# Altium PCB new.PcbDoc (part 1 of 2)
Units mil, origin at the board's own origin, x right, y up, seen from the top; angles counter-clockwise.
Board outline 4410 x 3685.04 mil, 2 copper layers (Top Layer, Bottom Layer), stack 21 mil thick; 81 components, 203 nets, 659 pads, 105 vias.
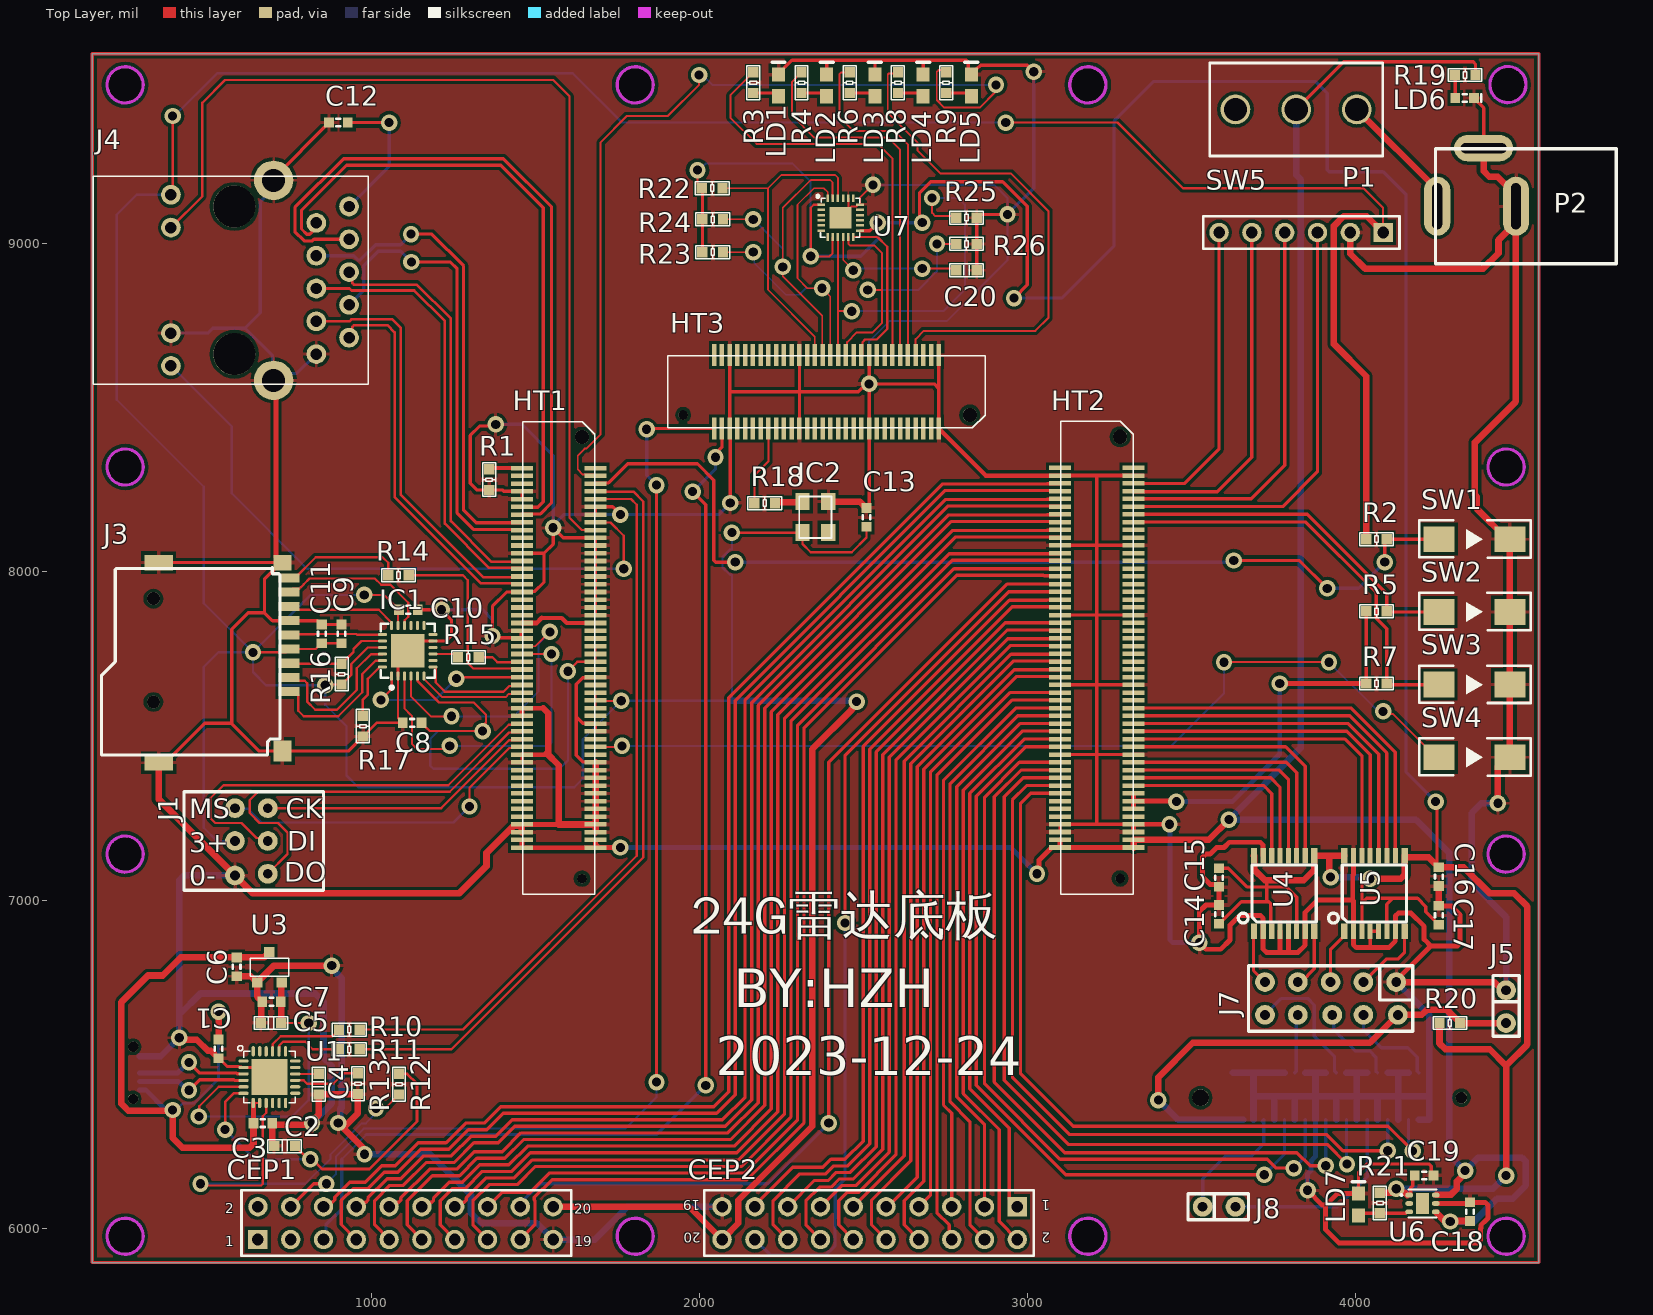
[diagram p0: Top Layer view]
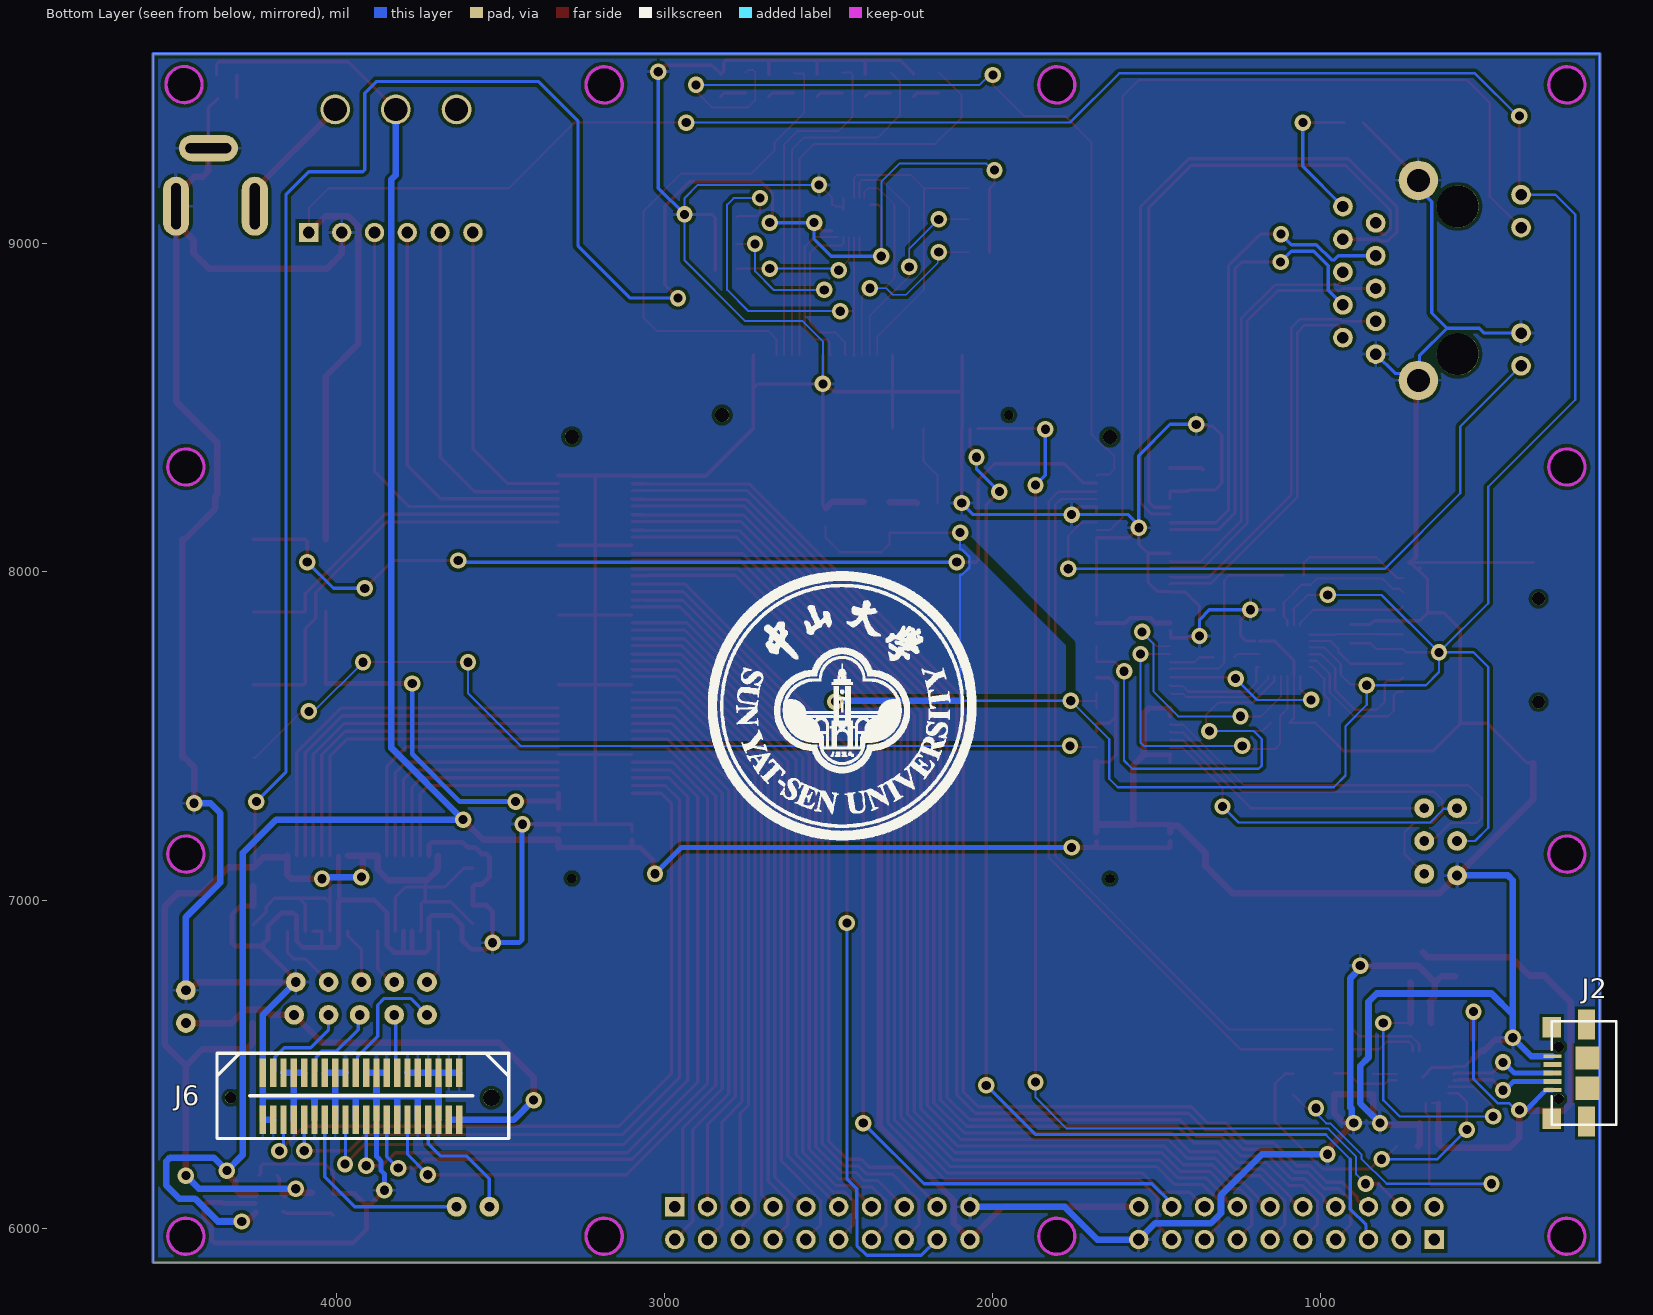
[diagram p1: Bottom Layer view, seen from below]

## Layer stack, top to bottom
Top Solder: solder mask 0.4, Solder Resist, Dk 3.5
Top Layer: signal copper 1.4
Dielectric 2: prepreg 2.8, PP-006, Dk 4.1
Dielectric 1: dielectric 12.6, FR-4, Dk 4.8
Dielectric 3: prepreg 2.8, PP-006, Dk 4.1
Bottom Layer: signal copper 1.4
Bottom Solder: solder mask 0.4, Solder Resist, Dk 3.5

## Board outline
150,5895 4560,5895 4560,9580.04 4559.45,9580 150,9580
cut-out: 305.12,9485 cw(c250,9485) 250,9429.88 cw(c250,9485) 194.88,9485 cw(c250,9485) 250,9540.12 cw(c250,9485)
cut-out: 305.12,5975 cw(c250,5975) 250,5919.88 cw(c250,5975) 194.88,5975 cw(c250,5975) 250,6030.12 cw(c250,5975)
cut-out: 305.12,7140 cw(c250,7140) 250,7084.88 cw(c250,7140) 194.88,7140 cw(c250,7140) 250,7195.12 cw(c250,7140)
cut-out: 305.12,8320 cw(c250,8320) 250,8264.88 cw(c250,8320) 194.88,8320 cw(c250,8320) 250,8375.12 cw(c250,8320)
cut-out: 1860.12,5975 cw(c1805,5975) 1805,5919.88 cw(c1805,5975) 1749.88,5975 cw(c1805,5975) 1805,6030.12 cw(c1805,5975)
cut-out: 1860.12,9485 cw(c1805,9485) 1805,9429.88 cw(c1805,9485) 1749.88,9485 cw(c1805,9485) 1805,9540.12 cw(c1805,9485)
cut-out: 3240.12,5975 cw(c3185,5975) 3185,5919.88 cw(c3185,5975) 3129.88,5975 cw(c3185,5975) 3185,6030.12 cw(c3185,5975)
cut-out: 3240.12,9485 cw(c3185,9485) 3185,9429.88 cw(c3185,9485) 3129.88,9485 cw(c3185,9485) 3185,9540.12 cw(c3185,9485)
cut-out: 4515.12,5975 cw(c4460,5975) 4460,5919.88 cw(c4460,5975) 4404.88,5975 cw(c4460,5975) 4460,6030.12 cw(c4460,5975)
cut-out: 4515.12,7140 cw(c4460,7140) 4460,7084.88 cw(c4460,7140) 4404.88,7140 cw(c4460,7140) 4460,7195.12 cw(c4460,7140)
cut-out: 4515.12,8320 cw(c4460,8320) 4460,8264.88 cw(c4460,8320) 4404.88,8320 cw(c4460,8320) 4460,8375.12 cw(c4460,8320)
cut-out: 4520.74,9485.83 cw(c4465.62,9485.83) 4465.62,9430.71 cw(c4465.62,9485.83) 4410.5,9485.83 cw(c4465.62,9485.83) 4465.62,9540.95 cw(c4465.62,9485.83)

## Design rules (kind name [scope] priority, off if disabled: settings)
Clearance Clearance_1 [All] p1: gap=10 ignorepadtopadclearanceinfootprint=FALSE except(0: Arc-Hole Track-Hole SMDPad-Hole THPad-Hole Via-Hole Fill-Hole Poly-Hole Region-Hole Text-Hole)
Clearance [All] p2: gap=5 ignorepadtopadclearanceinfootprint=FALSE except(0: Arc-Hole Track-Hole SMDPad-Hole THPad-Hole Via-Hole Fill-Hole Poly-Hole Region-Hole Text-Hole)
DiffPairsRouting [All] p1: maxlimit=10 minlimit=10 mostfreqgap=10 toplayer_minwidth=5 toplayer_maxwidth=15 toplayer_prefwidth=15 bottomlayer_minwidth=5 bottomlayer_maxwidth=15 bottomlayer_prefwidth=15 maxuncoupledlength=500
HoleToHoleClearance [All] p1: gap=5 allowstackedmicrovias=TRUE
PolygonConnect [All] p1: connectstyle=Relief reliefconductorwidth=10 reliefentries=4 polygonreliefangle="90 Angle" airgapwidth=10
RoutingVias [All] p1: holewidth=28 width=50 viastyle="Through Hole" minholewidth=28 minwidth=50 maxholewidth=28 maxwidth=50
SolderMaskExpansion [All] p1: expansion=4
Width [All] p1: maxlimit=20 minlimit=5 preferedwidth=10 minimp=50.000000 maximp=50.000000 favimp=50.000000
28 further rules are at their usual default settings.

## Classes and differential pairs
component class MPU9250: C20 R22 R23 R24 R25 R26 U7
component class Sheet2: C18 C19 J5 J6 J7 J8 LD7 R20 R21 U6
component class Sheet1: C14 C15 C16 C17 U4 U5
component class 15_PMU: LD6 P2 R19 SW5
component class 13_CEP: CEP1 CEP2
component class 12_PLCLK_100M: C13 IC2 R18
component class 11_BTN_LED_GPIO: LD1 LD2 LD3 LD4 LD5 P1 R2 R3 R4 R5 R6 R7 R8 R9 SW1 SW2 SW3 SW4
component class 07_PS_ETH_RJ45: C12 J4
component class 06_TF_CARD: C8 C9 C10 C11 IC1 J3 R14 R15 R16 R17
component class 05_USB_JTAG: J1
component class 03_UART_232: C1 C2 C3 C4 C5 C6 C7 J2 R10 R11 R12 R13 U1 U3
component class 02_connector: HT1 HT2 HT3 R1
differential pair B35_L22: +B35_L22_P -B35_L22_N
differential pair B35_L20: +B35_L20_P -B35_L20_N
differential pair B35_L18: +B35_L18_P -B35_L18_N
differential pair B35_L17: +B35_L17_P -B35_L17_N
differential pair B35_L16: +B35_L16_P -B35_L16_N
differential pair B35_L15: +B35_L15_P -B35_L15_N
differential pair B35_L14: +B35_L14_P -B35_L14_N
differential pair B35_L11: +B35_L11_P -B35_L11_N
differential pair B35_L5: +B35_L5_P -B35_L5_N
differential pair B35_L4: +B35_L4_P -B35_L4_N
differential pair B35_L3: +B35_L3_P -B35_L3_N
differential pair B35_L2: +B35_L2_P -B35_L2_N
differential pair B34_L22: +B34_L22_P -B34_L22_N
differential pair B34_L21: +B34_L21_P -B34_L21_N
differential pair B34_L19: +B34_L19_P -B34_L19_N
differential pair B34_L18: +B34_L18_P -B34_L18_N
differential pair B34_L17: +B34_L17_P -B34_L17_N
differential pair B34_L11: +B34_L11_P -B34_L11_N
differential pair B34_L10: +B34_L10_P -B34_L10_N
differential pair B34_L9: +B34_L9_P -B34_L9_N
differential pair B34_L8: +B34_L8_P -B34_L8_N
differential pair B34_L7: +B34_L7_P -B34_L7_N
differential pair B34_L4: +B34_L4_P -B34_L4_N
differential pair B34_L2: +B34_L2_P -B34_L2_N
differential pair NewDifferentialPair16: +B35_L6_P -B35_L6_N
differential pair NewDifferentialPair15: +B34_L16_P -B34_L16_N
differential pair NewDifferentialPair14: +B34_L15_P -B34_L15_N
differential pair NewDifferentialPair13: +B34_L14_P -B34_L14_N
differential pair NewDifferentialPair12: +B34_L23_P -B34_L23_N
differential pair NewDifferentialPair11: +B34_L12_P -B34_L12_N
differential pair NewDifferentialPair10: +B34_L20_P -B34_L20_N
differential pair NewDifferentialPair9: +B34_L13_P -B34_L13_N
differential pair NewDifferentialPair8: +B34_L24_P -B34_L24_N
differential pair NewDifferentialPair7: +B34_L5_P -B34_L5_N
differential pair NewDifferentialPair6: +B34_L3_P -B34_L3_N
differential pair NewDifferentialPair5: +B34_L6_P -B34_L6_N
differential pair NewDifferentialPair4: +B34_L1_P -B34_L1_N
differential pair NewDifferentialPair3: +ETH-TD3_P -ETH-TD3_N
differential pair NewDifferentialPair2: +ETH-TD2_P -ETH-TD2_N
differential pair NewDifferentialPair1: +ETH-TD1_P -ETH-TD1_N
differential pair ETH-TD0: +ETH-TD0_P -ETH-TD0_N

## Components (designator, comment, footprint, x,y, rotation, side; value= is the part's Value field where it differs from the comment)
C1 "10uf" CAP0603 535,6546.46 r90 top
C2 "10uf" CAP0603 670,6320 r0 top
C3 "100nF" C0603 736.5,6250 r0 top
C4 "4.7uF" C0603 840,6438.5 r90 top
C5 "100nF" C0603 695,6625 r0 top
C6 "2.2uf" CAP0603 590,6796.46 r90 top
C7 "10uf" CAP0603 696.46,6690 r0 top
C8 "0.1uf" CAP0603 1125,7540 r180 top value=0.1uF
C9 "0.1uf" CAP0603 910,7811.46 r90 top value=0.1uF
C10 "0.1uf" CAP0603 1113.54,7885 r0 top value=0.1uF
C11 "10uf/6V3" CAP0603 850,7811.46 r90 top value=4.7uF
C12 "0.1uf" CAP0603 900,9370 r0 top
C13 "0.1uf" CAP0603 2510,8166.46 r90 top value=10nF
C14 "1uf/6V3" CAP0603 3585,6956.46 r90 top value=4.7uF
C15 "1uf/6V3" CAP0603 3585,7068.54 r270 top value=4.7uF
C16 "1uf/6V3" CAP0603 4255,7071.46 r270 top value=4.7uF
C17 "1uf/6V3" CAP0603 4255,6953.54 r90 top value=4.7uF
C18 "1uf/6V3" CAP0603 4350,6050 r270 top value=4.7uF
C19 "1uf/6V3" CAP0603 4210,6160 r0 top value=4.7uF
C20 "100nF" C0603 2815,8920 r180 top
CEP1 "HEADER20" HEADER10X2X2.5 655,5965 r0 top
CEP2 "HEADER20" HEADER10X2X2.5 2970,6065 r180 top
HT1 "FX8-100S-SV" FX8-100S-SV92 1626.09,8286.14 r0 top
HT2 "FX8-100S-SV" FX8-100S-SV92 3266.49,8286.79 r0 top
HT3 "FX8-60S-SV" FX8-60S-SV92 2730.87,8661.58 r180 top
IC1 "TXS02612RTWR" QFN24 1111.77,7759.84 r90 top
IC2 "100MHZ" 3225 2354.37,8167.24 r90 top value=26MHz
J1 "JTAG" 2*3P 735,7330 r270 top
J2 "Micro_USB2.0_DIP1" MicroUsb 190.13,6472.37 r0 bottom
J3 "SDK" TF_K 750,7635.16 r180 top
J4 "HY911130A" HY911130A 582.91,8889.17 r270 top
J5 "2P" 2P 4460,6725 r270 top
J6 "radar" BTB_40P_0.8_G 3970.43,6503.31 r180 bottom
J7 "ZERO_O" 2*5P 3725,6750 r0 top
J8 "2P" 2P 3535,6065 r0 top
LD1 "LED" 0603D 2241.86,9450 r90 top
LD2 "LED" 0603D 2388.9,9450 r90 top
LD3 "LED" 0603D 2535.93,9450 r90 top
LD4 "LED" 0603D 2682.97,9450 r90 top
LD5 "LED" 0603D 2830,9450 r90 top
LD6 "LED" D0603 4333.54,9445 r180 top value=RED
LD7 "LED" 0603D 4010,6038.07 r90 top
P1 "HEADER6" HEADER1X6 4085,9035 r180 top
P2 "DC" DC5.0 4415,9198 r0 top
R1 "0R" R0603 1360,8281.5 r90 top value=390
R2 "20k" R0603 4065,8100 r180 top
R3 "2.2k" R0603 2165,9491.41 r90 top
R4 "2.2k" R0603 2312.03,9491.41 r90 top
R5 "20k" R0603 4065,7880 r180 top
R6 "2.2k" R0603 2459.07,9491.41 r90 top
R7 "20k" R0603 4065,7660 r180 top
R8 "2.2k" R0603 2606.1,9491.41 r90 top
R9 "2.2k" R0603 2753.14,9491.41 r90 top
R10 "100R" R0603 933.5,6605 r0 top
R11 "100R" R0603 933.5,6545 r0 top
R12 "10K" R0603 1085,6438.5 r90 top
R13 "10K" R0603 960,6440 r270 top
R14 "150R" R0603 1083.5,7990 r180 top value=150
R15 "49.9" R0603 1296.5,7740 r0 top
R16 "4.7K" R0603 910,7688.5 r270 top
R17 "4.7K" R0603 975,7530 r90 top
R18 "20R" R0603 2200,8210 r0 top
R19 "2K2" R0603 4335,9515 r180 top value=390
R20 "0R" R0603 4288.5,6625 r0 top value=390
R21 "4.7K" R0603 4075,6076.5 r90 top
R22 "10K" R0603 2040,9170 r180 top
R23 "10K" R0603 2041.5,8975 r180 top
R24 "10K" R0603 2041.5,9075 r180 top
R25 "10K" R0603 2815,9080 r0 top
R26 "10K" R0603 2815,9000 r0 top
SW1 "SW-1" SW-3X9 4255,8100 r0 top
SW2 "SW-1" SW-3X9 4255,7878.33 r0 top
SW3 "SW-1" SW-3X9 4255,7656.67 r0 top
SW4 "SW-1" SW-3X9 4255,7435 r0 top
SW5 "SW123" "SW1-2-3 -B" 3634.92,9410 r0 top
U1 "CP2104" QFN24_50P4X4X1 690,6460 r0 top
U3 "XC6206P182MR" SOT23 690,6795 r180 top
U4 "ADS7853IPWR" TSSOP16-0.65-5X4.4MM 3765,7020 r0 top
U5 "ADS7853IPWR" TSSOP16-0.65-5X4.4MM 4040,7020 r0 top
U6 "LP5912-3.3" WSON-6_L2.0-W2.0-P0.65-TL-EP -13787.64,19569.9 r0 top
U7 "MPU9250" MPU9250 2430,9080 r0 top

## Footprints (in the part's own frame and the unit in brackets; to place one, negate y for a bottom-side part, rotate by r counter-clockwise, add the part's x,y. Pads: shape width x height; smd on the part's side, far side on the other; paste and mask are expansions set on the pad)
2*3P [mil]
  round 60 hole 30: 1(50,-50) 2(50,-150) 3(150,-50) 4(150,-150) 5(250,-50) 6(255,-150)
  silkscreen extent 0,-305 300,120
2*5P [mil]
  round 60 hole 30: 1(0,0) 2(0,-100) 3(100,0) 4(100,-100) 5(200,0) 6(205,-100) 7(300,0) 8(300,-100) 9(400,0) 10(405,-100)
  silkscreen extent -50,-150 450,50
2P [mil]
  round 60 hole 30: 1(0,0) 2(100,0)
  silkscreen extent -45,-40 140,40
0603D [mm]
  rect 1.1x1 smd: 1(0,0) 2(1.7,0)
  silkscreen extent 2.63,-0.51 2.63,0.51, body extent -0.64,-0.58 2.34,0.58, height 0.76
3225 [mm]
  rect 1.3x1.1 smd: 1(-1.2,-1) 2(1.2,-1) 3(1.2,1) 4(-1.2,1)
  silkscreen extent -1.6,-1.25 1.6,1.25
BTB_40P_0.8_G [mm]
  rect 0.5x2.22 smd: 1(-6.477,-0.762) 2(-5.677,-0.762) 3(-4.877,-0.762) 4(-4.077,-0.762) 5(-3.277,-0.762) 6(-2.477,-0.762) 7(-1.677,-0.762) 8(-0.877,-0.762) 9(-0.077,-0.762) 10(0.723,-0.762) 11(1.523,-0.762) 12(2.323,-0.762) 13(3.123,-0.762) 14(3.923,-0.762) 15(4.723,-0.762) 16(5.523,-0.762) 17(6.323,-0.762) 18(7.123,-0.762) 19(7.923,-0.762) 20(8.723,-0.762) 21(8.723,-4.402) 22(7.923,-4.402) 23(7.123,-4.402) 24(6.323,-4.402) 25(5.523,-4.402) 26(4.723,-4.402) 27(3.923,-4.402) 28(3.123,-4.402) 29(2.323,-4.402) 30(1.523,-4.402) 31(0.723,-4.402) 32(-0.077,-4.402) 33(-0.877,-4.402) 34(-1.677,-4.402) 35(-2.477,-4.402) 36(-3.277,-4.402) 37(-4.077,-4.402) 38(-4.877,-4.402) 39(-5.677,-4.402) 40(-6.477,-4.402)
  round 0.9 hole 0.9 unplated: ""(-8.976,-2.692)
  round 1.3 hole 1.3 unplated: ""(11.222,-2.692)
  silkscreen extent -10.03,-5.84 12.57,0.76
C0603 [mm]
  rect 0.8x0.8 smd: 1(-0.8,0) 2(0.8,0)
  silkscreen extent -1.3,-0.5 1.3,0.5, body extent -1.3,-0.5 1.3,0.5, height 3.81
CAP0603 [mm]
  rect 0.75x0.8 smd: 1(-0.725,0) 2(0.725,0)
  silkscreen extent -0.15,-0.3 0.15,0.3, body extent -0.86,-0.46 0.86,0.46, height 0.92
D0603 [mm]
  rect 0.75x0.8 smd: A(0.725,0) K(-0.725,0)
  silkscreen extent -1.3,-0.3 0.15,0.3, body extent -0.86,-0.46 0.86,0.46, height 0.92
DC5.0 [mil]
  oval 80x180 hole 30 slot 140 at 90 deg: 1(-165.16,-83) 2(75,-83)
  oval 180x80 hole 30 slot 140 at 0 deg: 2(-23.43,94)
  silkscreen extent -170,-258 381,92
FX8-60S-SV92 [mm]
  rect 0.35x1.7 smd: A1(0,0) A2(0.6,0) A3(1.2,0) A4(1.8,0) A5(2.4,0) A6(3,0) A7(3.6,0) A8(4.2,0) A9(4.8,0) A10(5.4,0) A11(6,0) A12(6.6,0) A13(7.2,0) A14(7.8,0) A15(8.4,0) A16(9,0) A17(9.6,0) A18(10.2,0) A19(10.8,0) A20(11.4,0) A21(12,0) A22(12.6,0) A23(13.2,0) A24(13.8,0) A25(14.4,0) A26(15,0) A27(15.6,0) A28(16.2,0) A29(16.8,0) A30(17.4,0) B1(0,5.7) B2(0.6,5.7) B3(1.2,5.7) B4(1.8,5.7) B5(2.4,5.7) B6(3,5.7) B7(3.6,5.7) B8(4.2,5.7) B9(4.8,5.7) B10(5.4,5.7) B11(6,5.7) B12(6.6,5.7) B13(7.2,5.7) B14(7.8,5.7) B15(8.4,5.7) B16(9,5.7) B17(9.6,5.7) B18(10.2,5.7) B19(10.8,5.7) B20(11.4,5.7) B21(12,5.7) B22(12.6,5.7) B23(13.2,5.7) B24(13.8,5.7) B25(14.4,5.7) B26(15,5.7) B27(15.6,5.7) B28(16.2,5.7) B29(16.8,5.7) B30(17.4,5.7)
  round 1.092 hole 1.1: C1(-2.4,4.65)
  round 0.711 hole 0.75: C2(19.8,4.65)
  silkscreen extent -3.6,0.05 21.01,5.65, body extent -3.66,-0.87 21,6.63, height 3.81
FX8-100S-SV92 [mm]
  rect 1.7x0.35 smd: A1(-4.221,0.782) A2(-4.221,0.182) A3(-4.221,-0.418) A4(-4.221,-1.018) A5(-4.221,-1.618) A6(-4.221,-2.218) A7(-4.221,-2.818) A8(-4.221,-3.418) A9(-4.221,-4.018) A10(-4.221,-4.618) A11(-4.221,-5.218) A12(-4.221,-5.818) A13(-4.221,-6.418) A14(-4.221,-7.018) A15(-4.221,-7.618) A16(-4.221,-8.218) A17(-4.221,-8.818) A18(-4.221,-9.418) A19(-4.221,-10.018) A20(-4.221,-10.618) A21(-4.221,-11.218) A22(-4.221,-11.818) A23(-4.221,-12.418) A24(-4.221,-13.018) A25(-4.221,-13.618) A26(-4.221,-14.218) A27(-4.221,-14.818) A28(-4.221,-15.418) A29(-4.221,-16.018) A30(-4.221,-16.618) A31(-4.221,-17.218) A32(-4.221,-17.818) A33(-4.221,-18.418) A34(-4.221,-19.018) A35(-4.221,-19.618) A36(-4.221,-20.218) A37(-4.221,-20.818) A38(-4.221,-21.418) A39(-4.221,-22.018) A40(-4.221,-22.618) A41(-4.221,-23.218) A42(-4.221,-23.818) A43(-4.221,-24.418) A44(-4.221,-25.018) A45(-4.221,-25.618) A46(-4.221,-26.218) A47(-4.221,-26.818) A48(-4.221,-27.418) A49(-4.221,-28.018) A50(-4.221,-28.618) B1(1.479,0.782) B2(1.479,0.182) B3(1.479,-0.418) B4(1.479,-1.018) B5(1.479,-1.618) B6(1.479,-2.218) B7(1.479,-2.818) B8(1.479,-3.418) B9(1.479,-4.018) B10(1.479,-4.618) B11(1.479,-5.218) B12(1.479,-5.818) B13(1.479,-6.418) B14(1.479,-7.018) B15(1.479,-7.618) B16(1.479,-8.218) B17(1.479,-8.818) B18(1.479,-9.418) B19(1.479,-10.018) B20(1.479,-10.618) B21(1.479,-11.218) B22(1.479,-11.818) B23(1.479,-12.418) B24(1.479,-13.018) B25(1.479,-13.618) B26(1.479,-14.218) B27(1.479,-14.818) B28(1.479,-15.418) B29(1.479,-16.018) B30(1.479,-16.618) B31(1.479,-17.218) B32(1.479,-17.818) B33(1.479,-18.418) B34(1.479,-19.018) B35(1.479,-19.618) B36(1.479,-20.218) B37(1.479,-20.818) B38(1.479,-21.418) B39(1.479,-22.018) B40(1.479,-22.618) B41(1.479,-23.218) B42(1.479,-23.818) B43(1.479,-24.418) B44(1.479,-25.018) B45(1.479,-25.618) B46(1.479,-26.218) B47(1.479,-26.818) B48(1.479,-27.418) B49(1.479,-28.018) B50(1.479,-28.618)
  round 1.092 hole 1.1: C1(0.429,3.182)
  round 0.711 hole 0.75: C2(0.429,-31.018)
  silkscreen extent -4.17,-32.22 1.43,4.38, body extent -5.12,-32.32 2.38,4.48, height 3.81
HEADER1X6 [mm]
  rect 1.5x1.5 hole 0.9: 1(0,0)
  round 1.5 hole 0.9: 2(2.54,0) 3(5.08,0) 4(7.62,0) 5(10.16,0) 6(12.7,0)
  silkscreen extent -1.27,-1.27 13.92,1.27
HEADER10X2X2.5 [mm]
  rect 1.5x1.5 hole 0.9: 1(0,0)
  round 1.5 hole 0.9: 2(0,2.54) 3(2.54,0) 4(2.54,2.54) 5(5.08,0) 6(5.08,2.54) 7(7.62,0) 8(7.62,2.54) 9(10.16,0) 10(10.16,2.54) 11(12.7,0) 12(12.7,2.54) 13(15.24,0) 14(15.24,2.54) 15(17.78,0) 16(17.78,2.54) 17(20.32,0) 18(20.32,2.54) 19(22.86,0) 20(22.86,2.54)
  silkscreen extent -1.27,-1.27 24.25,3.81
HY911130A [mil]
  round 60 hole 35: 1(-225,350) 2(-175,250) 3(-125,350) 4(-75,250) 5(-25,350) 6(25,250) 7(75,350) 8(125,250) 9(175,350) 10(225,250) 11(-260.83,-192.91) 12(-160.83,-192.91) 13(160.83,-192.91) 14(260.83,-192.91)
  round 120 hole 70: 15(-304.92,120.08) 16(304.92,120.08)
  round 128 hole 128: " "(-225,0) " "(225,0)
  silkscreen extent -317,-430 317,409, body extent -317,-430 317,409, height 150
MicroUsb [mm]
  round 0.8 hole 0.8: 0(2.144,-2.032) 0(2.15,2)
  rect 1.4x0.305 smd: 1(2.647,1.293) 5(2.647,-1.307)
  rect 1.4x0.4 smd: 2(2.647,0.643) 3(2.647,-0.007) 4(2.647,-0.657)
  rect 1.4x1.6 smd: M1(2.697,3.531) M2(2.697,-3.556)
  rect 1.3x2.3 smd: S1(-0.003,3.743) S4(-0.003,-3.757)
  rect 1.9x1.8 smd: S2(-0.092,1.168) S3(-0.092,-1.168)
  silkscreen extent -2.3,-4.01 2.7,3.99, body extent -2.37,-3.74 2.63,4.26, height 2
MPU9250 [mm]
  rect 0.6x0.2 smd: 1(-1.472,1) 2(-1.472,0.6) 3(-1.472,0.2) 4(-1.472,-0.2) 5(-1.472,-0.6) 6(-1.472,-1) 13(1.528,-1) 14(1.528,-0.6) 15(1.528,-0.2) 16(1.528,0.2) 17(1.528,0.6) 18(1.528,1)
  rect 0.2x0.6 smd: 7(-0.972,-1.5) 8(-0.572,-1.5) 9(-0.172,-1.5) 10(0.228,-1.5) 11(0.628,-1.5) 12(1.028,-1.5) 19(1.028,1.5) 20(0.628,1.5) 21(0.228,1.5) 22(-0.172,1.5) 23(-0.572,1.5) 24(-0.972,1.5)
  rect 1.7x1.7 smd: 25(0.026,-0.003)
  silkscreen extent -1.83,-1.5 1.53,1.76
QFN24 [mm]
  oval 0.7x0.25 smd: 1(-1.95,1.25) 2(-1.95,0.75) 3(-1.95,0.25) 4(-1.95,-0.25) 5(-1.95,-0.75) 6(-1.95,-1.25) 13(1.95,-1.25) 14(1.95,-0.75) 15(1.95,-0.25) 16(1.95,0.25) 17(1.95,0.75) 18(1.95,1.25)
  oval 0.25x0.7 smd: 7(-1.25,-1.95) 8(-0.75,-1.95) 9(-0.25,-1.95) 10(0.25,-1.95) 11(0.75,-1.95) 12(1.25,-1.95) 19(1.25,1.95) 20(0.75,1.95) 21(0.25,1.95) 22(-0.25,1.95) 23(-0.75,1.95) 24(-1.25,1.95)
  rect 2.6x2.6 smd: P(0,0)
  silkscreen extent -2.97,-2.1 2.1,2.1, body extent -2.08,-2.07 2.07,2.08, height 0.8
QFN24_50P4X4X1 [mm] "QFN24_50P4X4X1"
  oval 0.8x0.25 smd: 1(-2,1.25) 2(-2,0.75) 3(-2,0.25) 4(-2,-0.25) 5(-2,-0.75) 6(-2,-1.25) 13(2,-1.25) 14(2,-0.75) 15(2,-0.25) 16(2,0.25) 17(2,0.75) 18(2,1.25)
  oval 0.25x0.8 smd: 7(-1.25,-2) 8(-0.75,-2) 9(-0.25,-2) 10(0.25,-2) 11(0.75,-2) 12(1.25,-2) 19(1.25,2) 20(0.75,2) 21(0.25,2) 22(-0.25,2) 23(-0.75,2) 24(-1.25,2)
  rect 2.8x2.8 smd: 25(0,0)
  silkscreen extent -2.45,-2 2,2.45, body extent -2.5,-2.5 2.5,2.5, height 3.81
R0603 [mm] "R0603"
  rect 0.8x0.8 smd: 1(-0.8,0) 2(0.8,0)
  silkscreen extent -1.3,-0.5 1.3,0.5, body extent -1.3,-0.5 1.3,0.5, height 3.81
SOT23 [mm]
  rect 0.8x0.8 smd: 1(0.95,1.175) 2(-0.95,1.175) 3(0,-1.175)
  silkscreen extent -1.5,-0.7 1.5,0.7, body extent -1.7,-1.78 1.7,1.78, height 3.81
"SW1-2-3 -B" [mm]
  round 2.3 hole 1.8: 1(0,0) 2(4.7,0) 3(9.4,0)
  silkscreen extent -2,-3.6 11.4,3.6, body extent -1.7,-3.3 11.1,3.3, height 11
SW-3X9 [mm]
  rect 2.4x2 smd: 1(0,0) 2(5.5,0)
  silkscreen extent -1.52,-1.42 7.11,1.47, body extent -1.42,-1.3 6.93,1.35, height 1.78
TF_K [mm]
  rect 2.2x1.2 smd: 0(10.1,-10) 11(10.1,5.5)
  rect 1.6x0.7 smd: 1(0,0) 2(0,-1.1) 3(0,-2.2) 4(0,-3.3) 5(0,-4.4) 6(0,-5.5) 7(0,-6.6) 8(0,-7.7) 9(0,-8.8)
  rect 1.4x1.2 smd: 10(0.5,-10)
  rect 1.4x1.6 smd: 12(0.5,4.6)
  Top Layer lines w0.254: 1.362,-9.543 1.312,-9.594
  silkscreen extent 0.7,-9.59 14.52,4.9
TSSOP16-0.65-5X4.4MM [mil]
  rect 19.7x47.2 smd: 1(-73.5,-115) 8(110.5,-115) 9(110.5,115) 16(-73.5,115)
  rect 15.7x47.2 smd: 2(-45.5,-115) 3(-19.5,-115) 4(5.5,-115) 5(31.5,-115) 6(56.5,-115) 7(82.5,-115) 10(82.5,115) 11(56.5,115) 12(31.5,115) 13(5.5,115) 14(-19.5,115) 15(-45.5,115)
  silkscreen extent -121,-90 116,87
WSON-6_L2.0-W2.0-P0.65-TL-EP [mm]
  oval 0.607x0.364 smd: 1(455.984,-342.12) 2(455.984,-342.77) 3(455.984,-343.42) 4(458.041,-343.42) 5(458.041,-342.77) 6(458.041,-342.12)
  rect 1x1.6 smd: 7(457.013,-342.77)
  silkscreen extent 455.31,-343.85 458.09,-341.69

## Part data
C1 C2 C6 C7 C8 C9 C10 C11 C12 C13: library part CAPACITOR, "Generic Capacitor"
C3 C4 C5 C20: library part CAP1, CURRENT=CIMAX, MAX_TEMP=CTMAX, PSpiceTemplate="C^@REFDES %1 %2 ?TOLERANCE|C^@REFDES| @VALUE ?IC/IC=@IC/ TC=@TC1,@TC2 ?TOLERANCE|\n.model C^@REFDES CAP C=1 DEV=@TOLERANCE% TC1=@TC1 TC2=@TC2 VC1=@VC1 VC2=@VC2|", VOLTAGE=CMAX, DIST=FLAT, KNEE=CBMAX, SLOPE=CSMAX, TC1=0, TC2=0, VC1=0, VC2=0
C14 C15 C16 C17 C18 C19: library part CAPACITOR_1UF, "Generic Capacitor"
CEP1 CEP2: library part HEADER10X2
HT1 HT2: library part FX8-100P-SV92
HT3: library part FX8-60P-SV92
IC1: library part TXS02612, "SDIO Port Expander with Voltage-Level Translation", Manufacturer="Texas Instruments"
IC2: library part FXO-HC5, "3.3V HCMOS Oscillator", Manufacturer="Fox Electronics"
J2: library part Micro_USB2_0.0_DIP1
J3: library part SD
LD1 LD2 LD3 LD4 LD5 LD7: library part LEDR
LD6: "Generic LED"
R1 R14 R16 R17 R19 R20 R21: library part RESISTOR, "Generic Resistor"
R2 R3 R4 R5 R6 R7 R8 R9 R18: library part Res, "1K"
R10 R11 R12 R13 R22 R23 R24 R25 R26: library part RES1, MAX_TEMP=RTMAX, POWER=RMAX, PSpiceTemplate="R^@REFDES %1 %2 ?TOLERANCE|R^@REFDES| @VALUE TC=@TC1,@TC2 ?TOLERANCE|\n.model R^@REFDES RES R=1 DEV=@TOLERANCE% TC1=@TC1 TC2=@TC2|", VOLTAGE=RVMAX, DIST=FLAT, SLOPE=RSMAX, TC1=0, TC2=0
R15: library part RESISTOR, "Resistor", LoadStatus=Load
SW1 SW2 SW3 SW4: "SW"
U3: library part XC6206P332MR

## Via types
v1: diameter 50, hole 28, Top Layer to Bottom Layer, 103 vias
v2: diameter 39.37, hole 39.37, Top Layer to Bottom Layer, 2 vias

## Nets (pads, with @x,y where several pads share a name; then routed paths per layer and width w, separated by ;. In a path a pad name is that pad's centre, name@x,y a point inside that pad or via, vN(x,y) a via of type N, cw(c..) or ccw(c..) an arc to the next point about the centre after c; other vN are vias at no path point)
5V_IN: C18.2 HT1.A49 HT1.A50 HT1.B49 HT1.B50 HT2.A49 HT2.A50 HT2.B49 HT2.B50 R19.1 SW5.2 U6.4 U6.6 | length 7765.6
  Top Layer w10: SW5.2@3819.96,9410 3964.96,9555 4360,9555 4366.5,9548.5 R19.1@4366.5,9515
  Top Layer w15: HT1.A49@1459.91,7179.19 HT1.A50@1459.91,7159.45 HT1.B50@1684.32,7159.45 ; HT1.B49@1684.32,7179.19 HT1.B50@1684.32,7159.45 ; v1(1760,7160) 1694.87,7160 1689.87,7165 HT1.B50@1684.32,7159.45 ; v1(3030,7080) 3036.7,7086.7 3036.7,7121.84 3074.95,7160.1 HT2.A50@3100.31,7160.1 ; HT2.A49@3100.31,7183.72 HT2.A50@3100.31,7160.1 ; HT2.B50@3324.72,7160.1 HT2.A50@3100.31,7160.1
  Top Layer w20: HT2.B50@3324.72,7160.1 HT2.B49@3324.72,7180.45 ; HT2.B49@3324.72,7183.72 3553.72,7183.72 v1(3615,7245) ; U6.4@4247.44,6046.57 4272.56,6021.46 C18.2@4350,6021.46 ; U6.6@4247.44,6102.17 4292.17,6102.17 4310,6120 4310,6141.88 4335,6166.88 v1(4335,6175)
  Bottom Layer w15: v1(1760,7160) 2950,7160 v1(3030,7080)
  Bottom Layer w20: SW5.2@3819.96,9410 3819.96,9209.98 3834.53,9195.41 3834.53,7464.53 v1(3615,7245) 4185,7245 4286.11,7143.89 4286.11,6223.89 v1(4335,6175) 4375,6215 4508.28,6215 4520,6203.28 4520,6130 4480,6090 4432.43,6090 4362.43,6020 v1(4290,6020)
ADC_3.3V: C14.1 C15.1 C16.1 C17.1 C19.1 R20.1 R21.2 R22.2 R23.2 R24.2 U4.3 U4.6 U4.9 U4.16 U5.3 U5.6 U5.9 U5.16 U6.1 U7.1 U7.8 U7.13 | length 10591.8
  Top Layer w5: U7.8@2406.78,9020.26 U7.8@2407.47,9020.94
  Top Layer w6: v1(1995,9225) 1995.76,9224.24 1995.76,9182.75 R22.2@2008.5,9170 ; v1(2340,8962.4) 2397.4,8962.4 2406.78,8971.78 U7.8@2406.78,9020.26 ; v1@2672,9073 v1(2680,9065)
  Top Layer w7: v1(2340,8962.4) 2340,9110 2349.38,9119.38 U7.1@2372.04,9119.38
  Top Layer w10: R22.2@2008.5,9170 2010,9168.5 R24.2@2010,9075 R23.2@2010,8975 ; U7.13@2490.15,9040.64 2520.64,9040.64 v1(2545,9065) ; v1@2672,9073 2672,9155.74 2706.26,9190 2925,9190 3000,9115 3000,8875 v1(2960,8835) ; C14.1@3585,6927.91 3585.98,6927.91 3653.07,6995 3730,6995 ; C15.1@3585,7097.09 3612.91,7097.09 3670,7040 3730,7040 ; 3725,7060 3730,7055 3730,7040 ; U4.3@3745.5,6905 3742.65,6907.85 3742.65,6989.14 3736.79,6995 3730,6995 ; U4.6@3821.5,6905 3821.5,7008.5 3790,7040 3730,7040 ; v1@4020,7065 4020.5,7064.5 4020.5,6990.5 ; U5.3@4020.5,6905 4020.5,6990.5 ; U5.6@4096.5,6905 4096.5,6986.5 4115,7005 ; U5.9@4150.5,7135 4150.5,7134.85 U5.9@4155.35,7130 ; U6.1@4158.55,6100.59 U6.1@4164.51,6100.59 4167.39,6100.59 4169.39,6102.59 4169.39,6122.76 4175,6128.36 4175,6153.54 C19.1@4181.46,6160 ; v1(4245,7300) 4249.02,7295.98 4249.02,7105 4254.02,7100 C16.1@4255,7100 ; C17.1@4255,6925 4254.02,6925 4215,6964.02 4215,6980 4190,7005 4115,7005 ; 3730,6995 3730,7040 ; 4020.5,6990.5 4035,7005 4115,7005
  Top Layer w20: U4.16@3691.5,7135 3691.65,7134.85 3691.65,7093.35 3725,7060 3843.28,7060 3875.35,7092.07 3875.35,7134.85 U4.9@3875.5,7135 3921,7135 ; v1(3925,7070) 3921,7074 3921,7135 ; U5.16@3966.5,7135 3921,7135 ; v1@4020,7065 v1(4045,7065) 4138.78,7065 4150.5,7076.72 U5.9@4150.5,7134.85 ; R21.2@4075,6107.99 4151.15,6107.99 U6.1@4158.55,6100.59 ; U5.9@4155.35,7130 4224.02,7130 C16.1@4249.02,7105 ; C16.1@4255,7100 4330.49,7100 4410.49,7020 4485,7020 4525,6980 4525,6560 4460,6495 ; R20.1@4257.01,6625 4257.01,6562.99 4275,6545 4410,6545 4460,6495 ; v1(4460,6160) 4460,6495
  Bottom Layer w6: v1@1990,9225 v1(1995,9225) 2000,9225 2020,9245 2285,9245 2340,9190 v1(2340,8962.4)
  Bottom Layer w10: v1(2340,8962.4) 2492.4,8962.4 2545,9015 v1(2545,9065) v1(2680,9065) ; v1(2960,8835) 3105,8835 3265,8995 3265,9375 3385,9495 3880,9495 3915,9460 3915,9225.86 3920.86,9220 4085,9220 4155,9150 4155,7390 v1(4245,7300)
  Bottom Layer w20: v1(3925,7070) 4040,7070 v1(4045,7065) ; v1(4125,6120) 4420,6120 v1(4460,6160)
B20: HT3.A24
B34_L1_N: CEP2.9 HT2.A27 | length 1942.1
  Top Layer w10: CEP2.9@2570,6065 2575,6065 2665,6155 2665,7406.57 2960.02,7701.59 3060.55,7701.59 3060.63,7701.67 3098.57,7701.67 HT2.A27@3100.31,7703.4
B34_L1_P: CEP2.8 HT2.A28 | length 2009.8
  Top Layer w10: CEP2.8@2670,5965 2625.47,6009.53 2625.47,6083.44 2685,6142.97 2685,7398.28 2968.31,7681.59 3060.55,7681.59 3060.63,7681.51 3098.57,7681.51 HT2.A28@3100.31,7679.78
B34_L2_N: HT2.B23
B34_L2_P: HT2.B24
B34_L3_N: CEP2.13 HT2.A23 | length 2153
  Top Layer w10: CEP2.13@2370,6065 2370.47,6065 2435,6129.53 2477.96,6129.53 2580,6231.57 2580,7435 2941.08,7796.08 3060.55,7796.08 3060.63,7796.16 3098.57,7796.16 HT2.A23@3100.31,7797.89
B34_L3_P: CEP2.12 HT2.A24 | length 2218.5
  Top Layer w10: CEP2.12@2470,5965 2425.47,6009.53 2425.47,6083.44 2451.56,6109.53 2486.24,6109.53 2600,6223.28 2600,7426.72 2949.36,7776.08 3060.55,7776.08 3060.63,7776 3098.57,7776 HT2.A24@3100.31,7774.27
B34_L4_N: HT2.B27
B34_L4_P: HT2.B28
B34_L5_N: CEP2.15 HT2.A21 | length 2272.6
  Top Layer w10: CEP2.15@2270,6065 2271.24,6065 2351.24,6145 2393.9,6145 2418.43,6169.53 2461.39,6169.53 2540,6248.14 2540,7451.57 2933.57,7845.13 HT2.A21@3100.31,7845.13
B34_L5_P: CEP2.14 HT2.A22 | length 2338.1
  Top Layer w10: CEP2.14@2370,5965 2325.47,6009.53 2325.47,6083.44 2367.03,6125 2402.19,6125 2426.71,6149.53 2469.67,6149.53 2560,6239.85 2560,7443.28 2940.04,7823.32 3060.55,7823.32 3060.63,7823.24 3098.57,7823.24 HT2.A22@3100.31,7821.51
B34_L6_N: CEP2.11 HT2.A25 | length 2033.5
  Top Layer w10: CEP2.11@2470,6065 2505.47,6100.47 2625,6220 2625,7423.43 2950.4,7748.84 3060.55,7748.84 3060.63,7748.91 3098.57,7748.91 HT2.A25@3100.31,7750.65
B34_L6_P: CEP2.10 HT2.A26 | length 2104.1
  Top Layer w10: CEP2.10@2570,5965 2525.47,6009.53 2525.47,6085.47 2645,6205 2645,7415.15 2958.69,7728.84 3060.55,7728.84 3060.63,7728.76 3098.57,7728.76 HT2.A26@3100.31,7727.02
B34_L7_N: HT2.B7 R5.1 SW2.1 | length 1084.9
  Top Layer w10: HT2.B7@3324.72,8175.84 3854.16,8175.84 4096.5,7933.5 R5.1@4096.5,7880 4098.16,7878.33 SW2.1@4255,7878.33
B34_L7_P: HT2.B8 R7.1 SW3.1 | length 1279.2
  Top Layer w10: HT2.B8@3324.72,8152.22 3849.49,8152.22 4064.25,7937.46 4064.25,7859.53 4096.5,7827.29 R7.1@4096.5,7660 4099.83,7656.67 SW3.1@4255,7656.67
B34_L8_N: HT2.B25
B34_L8_P: HT2.B26
B34_L9_N: HT2.B16
B34_L9_P: HT2.B17
B34_L10_N: HT2.B21
B34_L10_P: HT2.B22
B34_L11_N: HT2.B14
B34_L11_P: HT2.B15
B34_L12_N: CEP1.14 HT2.A12 | length 3382
  Top Layer w10: CEP1.14@1255,6065 1268.27,6065 1281.63,6078.36 1284.61,6078.36 1290.47,6084.21 1290.47,6091.73 1351.46,6152.72 1436.86,6152.72 1491.78,6207.64 2121.07,6207.64 2260,6346.57 2260,7553.28 2762.64,8055.92 3060.55,8055.92 3060.63,8056 3098.57,8056 HT2.A12@3100.31,8057.73
B34_L12_P: CEP1.15 HT2.A13 | length 3443.1
  Top Layer w10: CEP1.15@1355,5965 1310.47,6009.53 1310.47,6083.44 1359.75,6132.72 1445.15,6132.72 1500.06,6187.64 2129.35,6187.64 2280,6338.28 2280,7545 2770.92,8035.92 3060.55,8035.92 3060.63,8035.84 3098.57,8035.84 HT2.A13@3100.31,8034.11
B34_L13_N: CEP1.12 HT2.A9 | length 3513.4
  Top Layer w10: CEP1.12@1155,6065 1168.27,6065 1181.63,6078.36 1184.61,6078.36 1190.47,6084.21 1190.47,6091.73 1238.64,6139.89 1278.14,6139.89 1330.97,6192.72 1420.29,6192.72 1477.57,6250 2106.86,6250 2220,6363.14 2220,7573.28 2773.5,8126.79 3060.55,8126.79 3060.63,8126.87 3098.57,8126.87 HT2.A9@3100.31,8128.6
B34_L13_P: CEP1.13 HT2.A10 | length 3574.5
  Top Layer w10: CEP1.13@1255,5965 1210.47,6009.53 1210.47,6083.44 1246.92,6119.89 1286.42,6119.89 1339.25,6172.72 1428.58,6172.72 1485.86,6230 2115.15,6230 2240,6354.85 2240,7565 2781.79,8106.79 3060.55,8106.79 3060.63,8106.71 3098.57,8106.71 HT2.A10@3100.31,8104.98
B34_L14_N: CEP1.8 HT2.A5 | length 3752.9
  Top Layer w10: CEP1.8@955,6065 968.27,6065 981.63,6078.36 984.61,6078.36 990.47,6084.21 990.47,6091.73 1048.74,6150 1090,6150 1159.89,6219.89 1245,6219.89 1305.11,6280 1380,6280 1430,6330 2071.01,6330 2140,6398.99 2140,7609.85 2751.42,8221.28 3060.55,8221.28 3060.63,8221.35 3098.57,8221.35 HT2.A5@3100.31,8223.09
B34_L14_P: CEP1.9 HT2.A6 | length 3814
  Top Layer w10: CEP1.9@1055,5965 1010.47,6009.53 1010.47,6083.44 1057.03,6130 1098.28,6130 1168.18,6199.89 1253.28,6199.89 1313.39,6260 1388.28,6260 1438.28,6310 2079.29,6310 2160,6390.71 2160,7601.57 2759.71,8201.28 3060.55,8201.28 3060.63,8201.2 3098.57,8201.2 HT2.A6@3100.31,8199.47
B34_L15_N: CEP1.6 HT2.A3 | length 3867.6
  Top Layer w10: CEP1.6@855,6065 868.27,6065 882.96,6079.69 883.28,6079.69 889.14,6085.55 889.14,6094.14 935,6140 981.87,6140 1031.87,6190 1073.43,6190 1143.32,6259.89 1228.43,6259.89 1288.54,6320 1345,6320 1395,6370 2045,6370 2090,6415 2090,7616.42 2734.86,8261.28 2742.1,8268.52 3060.55,8268.52 3060.63,8268.6 3098.57,8268.6 HT2.A3@3100.31,8270.33
B34_L15_P: CEP1.7 HT2.A4 | length 3930.3
  Top Layer w10: CEP1.7@955,5965 909.14,6010.86 909.14,6084.14 945,6120 990.15,6120 1040.15,6170 1081.72,6170 1151.61,6239.89 1236.72,6239.89 1296.82,6300 1353.28,6300 1403.28,6350 2053.28,6350 2110,6406.72 2110,7608.14 2750.38,8248.52 3060.55,8248.52 3060.63,8248.44 3098.57,8248.44 HT2.A4@3100.31,8246.71
B34_L16_N: HT2.B3 P1.6 | length 963.9
  Top Layer w10: HT2.B3@3324.72,8270.33 3325.05,8270 3480,8270 3585,8375 P1.6@3585,9035
B34_L16_P: HT2.B4 P1.5 | length 1089.5
  Top Layer w10: HT2.B4@3324.72,8246.71 3326.43,8245 3580,8245 3685,8350 P1.5@3685,9035
B34_L17_N: HT2.B5 P1.4 | length 1212.5
  Top Layer w10: HT2.B5@3324.72,8223.09 3683.09,8223.09 3785,8325 P1.4@3785,9035
B34_L17_P: HT2.B6 P1.3 | length 1334
  Top Layer w10: HT2.B6@3324.72,8199.47 3779.47,8199.47 3885,8305 P1.3@3885,9035
B34_L18_N: HT2.B18
B34_L18_P: HT2.B19
B34_L19_N: CEP1.18 HT2.A16 | length 3081.8
  Top Layer w10: v1(2395,6320) 2395,7420 2938.24,7963.24 HT2.A16@3100.31,7963.24
  Bottom Layer w10: CEP1.18@1455,6065 1455,6075 1515,6135 2210,6135 v1(2395,6320)
B34_L19_P: CEP2.18 HT2.A17 | length 2645.8
  Top Layer w10: v1(2445,6930) 2445,7441.42 2943.2,7939.62 HT2.A17@3100.31,7939.62
  Bottom Layer w10: CEP2.18@2170,5965 2217.97,5917.03 2385,5917.03 2414.53,5946.56 2414.53,6029.53 2415,6030 2415,6120 2445,6150 v1(2445,6930)
B34_L20_N: CEP1.16 HT2.A14 | length 3257.5
  Top Layer w10: CEP1.16@1355,6065 1399.53,6109.53 1473.44,6109.53 1475.27,6107.7 1483.56,6107.7 1543.49,6167.64 2137.64,6167.64 2300,6330 2300,7533.28 2776.72,8010 3099.82,8010 HT2.A14@3100.31,8010.49
B34_L20_P: CEP1.17 HT2.A15 | length 3242.1
  Top Layer w10: CEP1.17@1455,5965 1499.53,6009.53 1499.53,6083.44 1497.7,6085.27 1497.7,6093.56 1551.78,6147.64 2145.92,6147.64 2320,6321.72 2320,7525 2785,7990 3050,7990 3051.84,7988.16 3099.02,7988.16 HT2.A15@3100.31,7986.87
B34_L21_N: HT2.B12
B34_L21_P: HT2.B13
B34_L22_N: HT2.B9
B34_L22_P: HT2.B10
B34_L23_N: CEP1.10 HT2.A7 | length 3633.4
  Top Layer w10: CEP1.10@1055,6065 1068.27,6065 1081.63,6078.36 1084.61,6078.36 1090.47,6084.21 1090.47,6091.73 1178.64,6179.89 1261.57,6179.89 1314.4,6232.72 1399.44,6232.72 1456.72,6290 2087.57,6290 2180,6382.43 2180,7593.28 2760.75,8174.03 3060.55,8174.03 3060.63,8174.11 3098.57,8174.11 HT2.A7@3100.31,8175.84
B34_L23_P: CEP1.11 HT2.A8 | length 3694.4
  Top Layer w10: CEP1.11@1155,5965 1110.47,6009.53 1110.47,6083.44 1186.92,6159.89 1269.85,6159.89 1322.68,6212.72 1407.72,6212.72 1465,6270 2095.86,6270 2200,6374.14 2200,7585 2769.03,8154.03 3060.55,8154.03 3060.63,8153.95 3098.57,8153.95 HT2.A8@3100.31,8152.22
B34_L24_N: CEP2.17 HT2.A18 | length 2404.5
  Top Layer w10: CEP2.17@2170,6065 2170,6069.53 2285.47,6185 2377.33,6185 2401.86,6209.53 2444.53,6209.53 2500,6265 2500,7468.14 2946.05,7914.19 3060.55,7914.19 3060.63,7914.27 3098.57,7914.27 HT2.A18@3100.31,7916
B34_L24_P: CEP2.16 HT2.A19 | length 2467.3
  Top Layer w10: CEP2.16@2270,5965 2225.47,6009.53 2225.47,6083.44 2307.03,6165 2385.62,6165 2410.14,6189.53 2452.81,6189.53 2520,6256.72 2520,7459.85 2925.28,7865.13 2954.34,7894.19 3060.55,7894.19 3060.63,7894.11 3098.57,7894.11 HT2.A19@3100.31,7892.38
B35_G14: HT3.A2
B35_J15: HT3.A3
B35_L1_P: HT3.A25
B35_L2_N: HT3.A29
B35_L2_P: HT3.A30
B35_L3_N: CEP1.5 HT3.B29 | length 3526.8
  Top Layer w10: v1(1980,8245) 2020,8205 v1(2020,6435) ; v1(2050,8350) 2050,8360.82 2069.46,8380.28 HT3.B29@2069.46,8437.17
  Bottom Layer w6: 910.47,6210.47 985,6285
  Bottom Layer w10: CEP1.5@855,5965 862.5,5972.5 862.5,6009.53 910.47,6057.5 910.47,6210.47 ; 985,6285 1870,6285 v1(2020,6435) ; v1(1980,8245) 2050,8315 v1(2050,8350)
B35_L3_P: CEP1.4 HT3.B30 | length 3540.9
  Top Layer w10: CEP1.4@755,6065 825,6135 v1(863.83,6135) ; v1(1840,8435) 1842.17,8437.17 HT3.B30@2045.83,8437.17 ; v1(1870,6445) v1(1870,8265)
  Bottom Layer w6: v1(863.83,6135) 892.47,6163.65 892.47,6217.93 977.54,6303 1775,6303 1870,6398 v1(1870,6445)
  Bottom Layer w10: v1(1840,8435) 1840,8295 v1(1870,8265)
B35_L4_N: HT3.A22
B35_L4_P: HT3.A23
B35_L5_N: HT3.A26
B35_L5_P: HT3.A27
B35_L6_N: HT3.B26
B35_L6_P: HT3.B27
B35_L11_N: HT3.B15
B35_L11_P: HT3.B16
B35_L13_P: HT3.B23 R18.1 | length 244.8
  Top Layer w7: R18.1@2168.5,8210 2168.5,8295 2211.19,8337.68 HT3.B23@2211.19,8437.17
B35_L14_N: HT3.A13 R26.1 U7.11 | length 938.1
  Top Layer w6: HT3.A13@2447.41,8661.58 2451.14,8665.31 2451.14,8700.42 2480.93,8730.21 2528.71,8730.21 2557,8758.5 2557,8860 ; U7.11@2454.72,9020.94 2454.72,9000.28 2460,8995 2535,8995 2557,8973 2557,8860 ; v1(2514.25,8860) 2557,8860 ; v1(2725,9000) R26.1@2783.5,9000
  Bottom Layer w6: v1(2514.25,8860) 2668.74,8860 2725,8916.26 v1(2725,9000)
B35_L14_P: HT3.A14 R25.1 U7.9 | length 1266.3
  Top Layer w6: HT3.A14@2423.22,8662.14 2423.22,8795 ; U7.9@2423.22,9020.94 2423.22,8795 ; v1(2465,8795) 2423.22,8795 ; v1(2710,9140) 2710,9095 2720,9085 2778.5,9085 R25.1@2783.5,9080
  Top Layer w10: HT3.A14@2423.22,8662.14 HT3.A14@2423.79,8661.58
  Bottom Layer w6: v1(2465,8795) 2745,8795 2810,8860 2810,9120 2790,9140 v1(2710,9140)
B35_L15_N: HT3.A20
B35_L15_P: HT3.A21
B35_L16_N: HT3.A17 R22.1 U7.22 | length 1002
  Top Layer w5: R22.1@2071.5,9170 2210,9170 ; HT3.A17@2352.92,8661.58 2352.92,8717.08 2210,8860 2210,9170 ; U7.22@2423.22,9139.06 2423.22,9201.78 2415,9210 2250,9210 2210,9170
B35_L16_P: HT3.A18
B35_L17_N: HT3.A8
B35_L17_P: HT3.A9
B35_L18_N: HT3.A15 R23.1 U7.24 | length 1044.5
  Top Layer w5: R23.1@2072.99,8975 v1(2165,8975) ; U7.24@2391.73,9139.06 2391.73,9158.27 2380,9170 2350,9170 2300,9120 2300,8895 2330,8865 v1(2375,8865) 2400.17,8839.83 HT3.A15@2400.17,8661.58
  Bottom Layer w5: v1(2165,8975) 2167.5,8972.5 2167.5,8942.5 2265,8845 2305,8845 2325,8865 v1(2375,8865)
B35_L18_P: HT3.A16 R24.1 U7.23 | length 1012.3
  Top Layer w5: R24.1@2072.99,9075 v1(2165,9075) ; HT3.A16@2376.54,8661.58 2375,8663.12 2375,8781.21 2255,8901.21 v1(2255,8930) 2255,9110 2340,9195 2400,9195 2406.78,9188.22 2406.78,9139.74 U7.23@2407.47,9139.06
  Bottom Layer w5: v1(2165,9075) 2255,8985 v1(2255,8930)
B35_L20_N: HT3.B11
B35_L20_P: HT3.B12
B35_L22_N: HT3.B8
B35_L22_P: HT3.B9
BTN0: HT1.B3 R2.1 SW1.1 | length 2999.6
  Top Layer w10: HT1.B3@1684.32,8269.69 1686.05,8271.42 1723.99,8271.42 1782.58,8330 1995,8330 2045,8280 2045,8035.86 2050.86,8030 v1(2110,8030) ; v1(3630,8035) 3830,8035 v1(3915,7950) ; v1(4090,8030) 4090,8093.5 R2.1@4096.5,8100 SW1.1@4255,8100
  Bottom Layer w10: v1(2110,8030) 3625,8030 v1(3630,8035) ; v1(3915,7950) 4010,7950 v1(4090,8030)
CLK1: HT2.B40 U4.12 | length 716.8
  Top Layer w10: HT2.B40@3324.72,7396.32 3768.68,7396.32 3796.5,7368.5 U4.12@3796.5,7135
CLK2: HT2.B34 U5.12 | length 1095.4
  Top Layer w10: HT2.B34@3324.72,7538.05 3978.52,7538.05 4071.5,7445.07 U5.12@4071.5,7135
CON9: CEP1.2
CON17: CEP1.3
CON18: CEP1.1
CON25: CEP2.6 HT2.A31 | length 1904.7
  Top Layer w10: CEP2.6@2770,5965 2762.5,5972.5 2762.5,6009.53 2725,6047.03 2725,7380 2955,7610 3099.22,7610 HT2.A31@3100.31,7608.91
CON26: CEP2.4 HT2.A33 | length 1854.4
  Top Layer w10: CEP2.4@2870,5965 2825.47,6009.53 2825.47,6324.53 2765,6385 2765,7355 2971.67,7561.67 HT2.A33@3100.31,7561.67
CON27: CEP2.2 HT2.A35 | length 1808.4
  Top Layer w10: CEP2.2@2970,5965 2914.53,6020.47 2914.53,6300.47 2805,6410 2805,7335 2985,7515 3099.73,7515 HT2.A35@3100.31,7514.43
CON33: CEP2.7 HT2.A30 | length 1835.3
  Top Layer w10: CEP2.7@2670,6065 2705,6100 2705,7390 2947.54,7632.54 HT2.A30@3100.31,7632.54
CON34: CEP2.5 HT2.A32 | length 1756.9
  Top Layer w10: CEP2.5@2770,6065 2770,6350 2745,6375 2745,7365 2965.29,7585.29 HT2.A32@3100.31,7585.29